# EAGLE board GPSClock_Display (EAGLE 6.5.0)
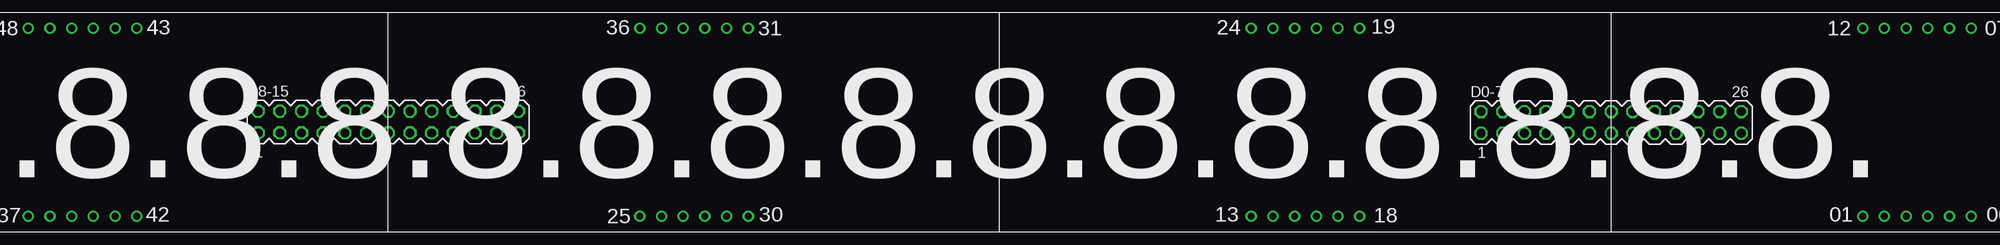
[diagram p0: board, top side]
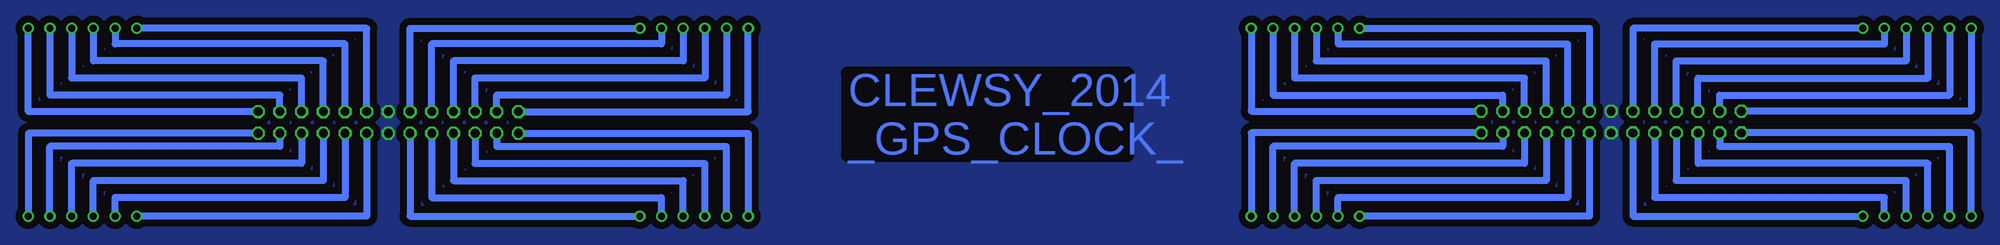
[diagram p1: board, bottom side, seen from below]

No outline drawn. Coordinates in mm, seen from the top.
Copper layers (1*16): Top 0.035mm / dielectric 1.5mm / Bottom 0.035mm
Design rules "default": minimum track width 10mil, minimum drill 24mil, track to track 8mil, track to pad 8mil, pad to pad 8mil, via to via 8mil, smd to smd 8mil, copper to edge 40mil, drill to drill 8mil, minimum pad ring 10mil, minimum via ring 8mil, stop-mask expansion 4mil, vias tented up to drill 0mil, thermal gap 10mil

## Footprints (pad centres in the part's own frame; a part is rotated, then mirrored left to right if it is on the bottom)
MA13-2 = drill 1.016 octagon: 1 -15.24,-1.27; 2 -15.24,1.27; 3 -12.7,-1.27; 4 -12.7,1.27; 5 -10.16,-1.27; 6 -10.16,1.27; 7 -7.62,-1.27; 8 -7.62,1.27; 9 -5.08,-1.27; 10 -5.08,1.27; 11 -2.54,-1.27; 12 -2.54,1.27; 13 0,-1.27; 14 0,1.27; 15 2.54,-1.27; 16 2.54,1.27; 17 5.08,-1.27; 18 5.08,1.27; 19 7.62,-1.27; 20 7.62,1.27; 21 10.16,-1.27; 22 10.16,1.27; 23 12.7,-1.27; 24 12.7,1.27; 25 15.24,-1.27; 26 15.24,1.27
4X7X4_SEG = drill 0.8: P$1 244.25,1.85; P$2 246.79,1.85; P$3 249.33,1.85; P$4 251.87,1.85; P$5 254.41,1.85; P$6 256.95,1.85; P$7 256.95,23.85; P$8 254.41,23.85; P$9 251.87,23.85; P$10 249.33,23.85; P$11 246.79,23.85; P$12 244.25,23.85; P$13 172.65,1.85; P$14 175.19,1.85; P$15 177.73,1.85; P$16 180.27,1.85; P$17 182.81,1.85; P$18 185.35,1.85; P$19 185.35,23.85; P$20 182.81,23.85; P$21 180.27,23.85; P$22 177.73,23.85; P$23 175.19,23.85; P$24 172.65,23.85; P$25 101.05,1.85; P$26 103.59,1.85; P$27 106.13,1.85; P$28 108.67,1.85; P$29 111.21,1.85; P$30 113.75,1.85; P$31 113.75,23.85; P$32 111.21,23.85; P$33 108.67,23.85; P$34 106.13,23.85; P$35 103.59,23.85; P$36 101.05,23.85; P$37 29.45,1.85; P$38 31.99,1.85; P$39 34.53,1.85; P$40 37.07,1.85; P$41 39.61,1.85; P$42 42.15,1.85; P$43 42.15,23.85; P$44 39.61,23.85; P$45 37.07,23.85; P$46 34.53,23.85; P$47 31.99,23.85; P$48 29.45,23.85

## Placement (x,y rotation side)
D0-7  [MA13-2]  214.82,13.8 0 top
D8-15  [MA13-2]  71.63,13.85 0 top
U$1  4X7X4_SEG  [4X7X4_SEG]  0.03,0.97 0 top

## Library data of the parts
D0-7 D8-15 = con-lstb; OC_FARNELL: unknown; OC_NEWARK: unknown
U$1 = 4x7x4_SEG

## Nets
GND: D0-7.13 D0-7.14 D8-15.13 D8-15.14
N$1: D0-7.1 U$1.P$13
N$2: D0-7.3 U$1.P$14
N$3: D0-7.5 U$1.P$15
N$4: D0-7.7 U$1.P$16
N$5: D0-7.9 U$1.P$17
N$6: D0-7.11 U$1.P$18
N$7: D0-7.15 U$1.P$1
N$8: D0-7.17 U$1.P$2
N$9: D0-7.19 U$1.P$3
N$10: D0-7.21 U$1.P$4
N$11: D0-7.23 U$1.P$5
N$12: D0-7.25 U$1.P$6
N$13: D0-7.2 U$1.P$24
N$14: D0-7.4 U$1.P$23
N$15: D0-7.6 U$1.P$22
N$16: D0-7.8 U$1.P$21
N$17: D0-7.10 U$1.P$20
N$18: D0-7.12 U$1.P$19
N$19: D0-7.16 U$1.P$12
N$20: D0-7.18 U$1.P$11
N$21: D0-7.20 U$1.P$10
N$22: D0-7.22 U$1.P$9
N$23: D0-7.24 U$1.P$8
N$24: D0-7.26 U$1.P$7
N$25: D8-15.25 U$1.P$30
N$26: D8-15.23 U$1.P$29
N$27: D8-15.21 U$1.P$28
N$28: D8-15.19 U$1.P$27
N$29: D8-15.17 U$1.P$26
N$30: D8-15.15 U$1.P$25
N$31: D8-15.11 U$1.P$42
N$32: D8-15.9 U$1.P$41
N$33: D8-15.7 U$1.P$40
N$34: D8-15.5 U$1.P$39
N$35: D8-15.3 U$1.P$38
N$36: D8-15.1 U$1.P$37
N$37: D8-15.26 U$1.P$31
N$38: D8-15.24 U$1.P$32
N$39: D8-15.22 U$1.P$33
N$40: D8-15.20 U$1.P$34
N$41: D8-15.18 U$1.P$35
N$42: D8-15.16 U$1.P$36
N$43: D8-15.12 U$1.P$43
N$44: D8-15.10 U$1.P$44
N$45: D8-15.8 U$1.P$45
N$46: D8-15.6 U$1.P$46
N$47: D8-15.4 U$1.P$47
N$48: D8-15.2 U$1.P$48

## Tracks (layer width: path | path; a pad name or v marks a point on that pad's centre or on a via)
GND
  pour Bottom (isolate 0.813, no thermals): 10,-4 10,31.7 276.4,31.7 276.4,-4
N$1
  Bottom 0.813: D0-7.1 172.68,12.53 U$1.P$13
N$2
  Bottom 0.813: D0-7.3 202.12,11 175.22,11 U$1.P$14
N$3
  Bottom 0.813: D0-7.5 204.66,9 177.76,9 U$1.P$15
N$4
  Bottom 0.813: D0-7.7 207.2,7 180.3,7 U$1.P$16
N$5
  Bottom 0.813: D0-7.9 209.74,5 182.84,5 U$1.P$17
N$6
  Bottom 0.813: D0-7.11 212.28,2.82 U$1.P$18
N$7
  Bottom 0.813: D0-7.15 217.36,2.82 U$1.P$1
N$8
  Bottom 0.813: D0-7.17 219.9,5 246.82,5 U$1.P$2
N$9
  Bottom 0.813: D0-7.19 222.44,7 249.36,7 U$1.P$3
N$10
  Bottom 0.813: D0-7.21 224.98,9 251.9,9 U$1.P$4
N$11
  Bottom 0.813: D0-7.23 227.52,11 254.44,11 U$1.P$5
N$12
  Bottom 0.813: D0-7.25 256.98,12.53 U$1.P$6
N$13
  Bottom 0.813: D0-7.2 172.68,15.07 U$1.P$24
N$14
  Bottom 0.813: U$1.P$23 175.22,17 202.12,17 D0-7.4
N$15
  Bottom 0.813: U$1.P$22 177.76,19 204.66,19 D0-7.6
N$16
  Bottom 0.813: U$1.P$21 180.3,21 207.2,21 D0-7.8
N$17
  Bottom 0.813: U$1.P$20 182.84,23 209.74,23 D0-7.10
N$18
  Bottom 0.813: D0-7.12 212.28,24.82 U$1.P$19
N$19
  Bottom 0.813: D0-7.16 217.36,24.82 U$1.P$12
N$20
  Bottom 0.813: D0-7.18 219.9,23 246.82,23 U$1.P$11
N$21
  Bottom 0.813: D0-7.20 222.44,21 249.36,21 U$1.P$10
N$22
  Bottom 0.813: D0-7.22 224.98,19 251.9,19 U$1.P$9
N$23
  Bottom 0.813: D0-7.24 227.52,17 254.44,17 U$1.P$8
N$24
  Bottom 0.813: D0-7.26 256.98,15.07 U$1.P$7
N$25
  Bottom 0.813: D8-15.25 113.78,12.58 U$1.P$30
N$26
  Bottom 0.813: D8-15.23 84.33,11 111.24,11 U$1.P$29
N$27
  Bottom 0.813: D8-15.21 81.79,9 108.7,9 U$1.P$28
N$28
  Bottom 0.813: D8-15.19 79.25,7 106.16,7 U$1.P$27
N$29
  Bottom 0.813: D8-15.17 76.71,5 103.62,5 U$1.P$26
N$30
  Bottom 0.813: D8-15.15 74.17,2.82 U$1.P$25
N$31
  Bottom 0.813: D8-15.11 69.09,2.82 U$1.P$42
N$32
  Bottom 0.813: D8-15.9 66.55,5 39.64,5 U$1.P$41
N$33
  Bottom 0.813: D8-15.7 64.01,7 37.1,7 U$1.P$40
N$34
  Bottom 0.813: D8-15.5 61.47,9 34.56,9 U$1.P$39
N$35
  Bottom 0.813: D8-15.3 58.93,11 32.02,11 U$1.P$38
N$36
  Bottom 0.813: U$1.P$37 29.48,12.58 D8-15.1
N$37
  Bottom 0.813: U$1.P$31 113.78,15.12 D8-15.26
N$38
  Bottom 0.813: U$1.P$32 111.24,17 84.33,17 D8-15.24
N$39
  Bottom 0.813: U$1.P$33 108.7,19 81.79,19 D8-15.22
N$40
  Bottom 0.813: U$1.P$34 106.16,21 79.25,21 D8-15.20
N$41
  Bottom 0.813: U$1.P$35 103.62,23 76.71,23 D8-15.18
N$42
  Bottom 0.813: U$1.P$36 74.17,24.82 D8-15.16
N$43
  Bottom 0.813: U$1.P$43 69.09,24.82 D8-15.12
N$44
  Bottom 0.813: U$1.P$44 39.64,23 66.55,23 D8-15.10
N$45
  Bottom 0.813: U$1.P$45 37.1,21 64.01,21 D8-15.8
N$46
  Bottom 0.813: U$1.P$46 34.56,19 61.47,19 D8-15.6
N$47
  Bottom 0.813: U$1.P$47 32.02,17 58.93,17 D8-15.4
N$48
  Bottom 0.813: U$1.P$48 29.48,15.12 D8-15.2

## Text on the board
Bottom: CLEWSY_2014 / _GPS_CLOCK_